# Altium PCB Misaka-v1.0.PcbDoc (part 2 of 2)
Units mm, origin at the board's own origin, x right, y up, seen from the top; angles counter-clockwise.
Board outline 100 x 100 mm, 2 copper layers (Top Layer, Bottom Layer); 149 components, 122 nets, 881 pads, 13 vias.
Unrouted connection lines stored in the file: 482.
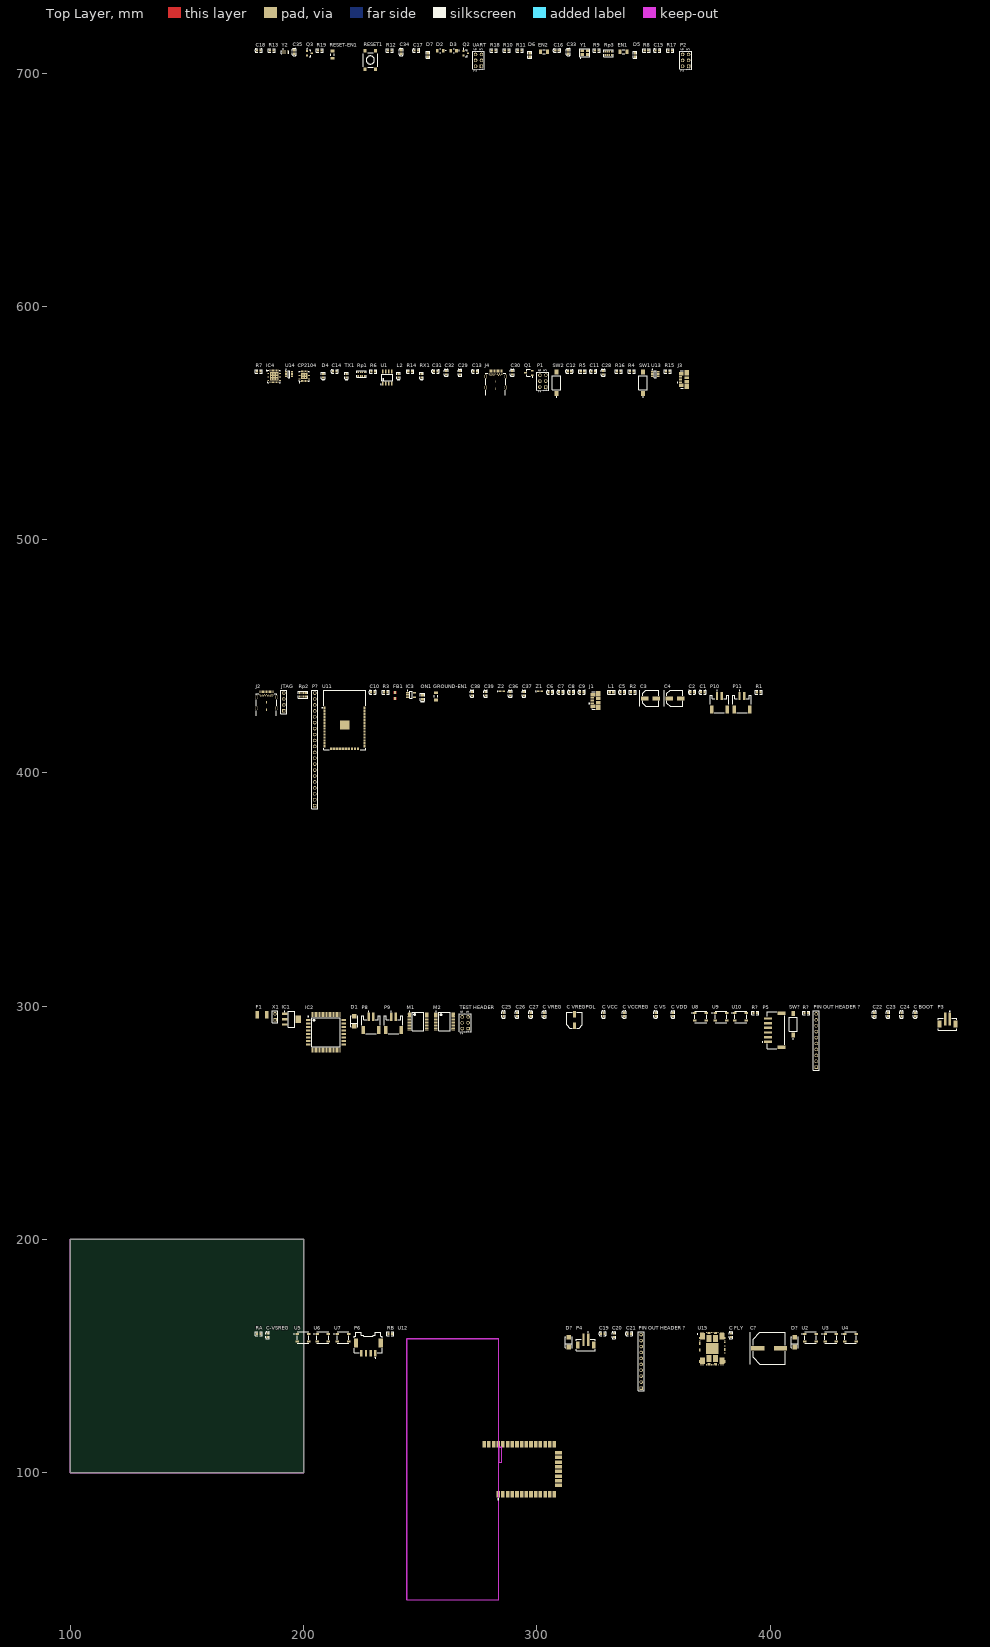
[diagram p0: Top Layer view]

## Part data (continued)
U2 U3 U4 U5 U6 U7 U8 U9 U10: library part CMP-2000-05026-1, "Intelligent Control LED Integrated Light Source, 3.5 to 5.3 V, -25 to 80 degC, 4-Pin SMD, RoHS, Tape and Reel / 1655", Color=Red,Green,Blue(RGB), Manufacturer=Adafruit-Industries-LLC, Package Description="4-Pin Surface Mount Device, Body 5 x 5 mm", Package Reference=1655, Category=Optoelectronics, Configuration=Discrete, Controller Type=-, Datasheet URL=http://datasheet.octopart.com/ADA1655-Adafruit-Industries-datasheet-32028139.pdf, Datasheet Version=May-13, Family=Addressable,Specialty, Interface=-, Manufacturer URL=https://www.adafruit.com/, Mounting Type=SurfaceMount, Number of LEDs=10, Series=Neopixel, Size / Dimension=5.00mmLx5.00mmW, Utilized LED=WS2812(5050)
U11: library part CMP-2000-07454-1, "Espressif System, 2.7 to 3.6 V, -40 to 85 degC, 38-Pin SMD", Manufacturer=Olimex, Package Description="38-Pin Surface Mount Device, Body 18 x 25.5 mm, Pitch 1.27 mm", Datasheet URL=http://www.espressif.com/sites/default/files/documentation/esp-wroom-32_datasheet_en.pdf, Datasheet Version="Rev. 2.1, 09/2017", Manufacturer URL=https://www.olimex.com, Mounting Technology=SurfaceMount, Package Reference=ESP-WROOM-32, RoHSCompliant=false
U12: library part CMP-0009-00001-1, "XBee ZB SMT RF Module, 2.4 GHz, 250 kbps, -100 dBm, 2.1 to 3.6 V, 28 mA, 3.1 mW, -40 to 85 degC, 37-Pin Module, RoHS", Manufacturer="Digi international", Operating Current (Receive)="28 mA", Operating Frequency Band="ISM 2.4 to 2.5 GHz", Operating Temperature="-40 to 85 degC", Supply Voltage="2.1 to 3.6 V", Transmit Power Output="3.1 mW", ComponentLink1Description="Manufacturer URL", ComponentLink1URL=http://www.digi.com/, ComponentLink2Description=Datasheet, ComponentLink2URL=http://ftp1.digi.com/support/documentation/90002002_K.pdf, ComponentLink3Description="Package Specification", ComponentLink3URL=http://ftp1.digi.com/support/documentation/90002002_K.pdf, DatasheetVersion=Sep-13, Indoor/Urban Range="Up to 200 ft. (60 m)", Mounting Technology="Surface Mount", Outdoor RF line-of-sight Range="Up to 4000 ft. (1200 m)", PackageDescription="37-Pin Module, Body 21.996 x 33.782 mm, Pitch 2.007 mm", PackageReference=XB24CZ7RIS-004-Module-37, PackageVersion=6/9/2013, PartNumber=XB24CZ7RIS-004, Receiver Sensitivity="-100 dBm", RF Data Rate="250000 bps", RoHS=TRUE
U13 U14: library part CMP-2000-05192-1, "Diode Array, 6 V, 10 A, -40 to 125 degC, 6-Pin SOT-23, RoHS, Tape and Reel", Clamping Voltage=15V, Manufacturer=Littelfuse, Maximum Operating Temperature=+85C, Minimum Operating Temperature=-40C, Package / Case=SOT-23-6, Package Description="6-Pin Small Outline Transistor, Body 2.9 x 1.625 mm, Pitch 0.95 mm", Package Reference=SOT23-6, Pd - Power Dissipation=150W, Peak Surge Current=10A, Working Voltage=6V, =SP3050-04HTG, Brand=Littelfuse, Datasheet URL=http://www.littelfuse.com/~/media/electronics/datasheets/tvs_diode_arrays/littelfuse_tvs_diode_array_srv05_datasheet.pdf.pdf, Datasheet Version=May-15, Height=1.45mm, Length=3mm, Manufacturer URL=http://www.littelfuse.com/, Mounting Style=SMD/SMT, Number of Channels=4Channel, Package URL=http://www.vishay.com/docs/28729/28729.pdf, Packaging=Reel, Polarity=Bidirectional, Product Category=TVSDiodeArrays, RoHS=True, Series=SRV05, Termination Style=SMD/SMT, Type=TVSDiodeArraysLowCapacitanceESDProtection, Width=3mm
U15: library part CMP-1005-00005-1, "System-In-Package Integrating Microstepping Controller and 10 A Power MOSFET, 7.5 to 85 V, -40 to 150 degC, 102-Pin QFN (VFQFN), RoHS, Tray", Manufacturer=STMicroelectronics, Operating Voltage="7.5 to 85 V", Temperature Range="-40 to 150 degC", ComponentLink1Description="Manufacturer URL", ComponentLink1URL=www.st.com, ComponentLink2Description=Datasheet, ComponentLink2URL=http://www.st.com/st-web-ui/static/active/en/resource/technical/document/datasheet/DM00090983.pdf, ComponentLink3Description="Package Specification", ComponentLink3URL=http://www.st.com/st-web-ui/static/active/en/resource/technical/document/datasheet/DM00090983.pdf, DatasheetVersion="Rev. 4", Iboot="2.6 mA Typ.", Mounting Technology="Surface Mount", PackageDescription="102-Pin Quad Flat Non-Leaded Package, Body 11 x 14 mm", Packing=Tray, PartNumber=POWERSTEP01, RDS(on)@125 degC="23 MOhm Typ.", RoHS=TRUE, RpumpHS="10 Ohm Typ."
X1: "Header, 2-Pin", LatestRevisionDate=17-Jul-2002, LatestRevisionNote="Re-released for DXP Platform.", Publisher="Altium Limited"
Y1: library part "SMD-3225_4P  16MHZ 9PF 10PPM", "贴片晶振", Package=SMD-3225_4P, SuppliersPartNumber=C13738, ComponentLink1Description=供应商链接, ComponentLink1URL=http://www.szlcsc.com/product/details_14393.html, Supplier=LC
Y2: library part CMP-0588-00001-2, "Ceramic Resonator, 16 MHz with Built-in Capacitance, Thickness Expander Mode, Initial Frequency Tolerance +/- 0.5%, Load Capacity 15 pF, -20 to 80 degC, 3.2 x 1.3 x 1 mm SMD, RoHS, Reel", Initial Frequency Tolerance="+/- 0.5%", Load Capacity="15 pF", Manufacturer=Murata, Operating Temperature Range="-20 to 80 degC", Oscillating Frequency="16 MHz", ComponentLink1Description="Manufacturer URL", ComponentLink1URL=http://www.murata.com/, ComponentLink2Description=Datasheet, ComponentLink2URL=http://www.murata.com/products/catalog/pdf/p16e.pdf, DatasheetVersion="Rev. P16E-22", Initial Tolerance="+/- 0.5%", Mounting Technology="Surface Mount", PackageDescription="3-Pin SMD, Body 3.2 x 1.3 mm, Pitch 0.95 mm", PackageReference=CSTCE_V-3, Packing=Reel, PartNumber=CSTCE16M0V53-R0, RoHS=TRUE
Z1 Z2: library part CMP-0584-00001-2, "ESD Protector, 5 V Supply, -40 to 85 degC, 1.6 x 0.8 x 0.55 mm SMD, RoHS, Tape and Reel", Manufacturer=Bourns, Operating Temperature="-40 to 85 degC", CO="0.5 pF", ComponentLink1Description="Manufacturer URL", ComponentLink1URL=http://www.bourns.com/, ComponentLink2Description=Datasheet, ComponentLink2URL=http://www.bourns.com/data/global/pdfs/MLC.pdf, DatasheetVersion="Rev. S", Mounting Technology="Surface Mount", PackageDescription="2-Pin SMD, Body 1.6 x 0.8 mm, Pitch 1.52 mm", PackageReference=CG0603-2, Packing="Tape and Reel", PartNumber=CG0603MLC-05E, RoHS=TRUE, RT="1 ns", VC="20 V", VDC="5 V", VT="150 V"

## Via types
v1: diameter 0.5, hole 0.2, Top Layer to Bottom Layer, 13 vias

## Nets (pads, with @x,y where several pads share a name; then routed paths per layer and width w, separated by ;. In a path a pad name is that pad's centre, name@x,y a point inside that pad or via, vN(x,y) a via of type N, cw(c..) or ccw(c..) an arc to the next point about the centre after c; other vN are vias at no path point)
+3.3V: "TEST HEADER.3" C10.2 C29.1 C31.1 C34.1 C35.1 CP2104.5 CP2104.6 CP2104.7 D4.A D5.A D6.A D7.A IC3.5 R14.1 R17.2 U1.6 U11.2 U12.2 U14.5 UART.1
+5: "TEST HEADER.5" C4.1 C7.1 C8.1 C9.1 C11.1 C19.1 C20.1 C21.1 C22.1 C23.1 C24.1 C25.1 C26.1 C27.1 C36.1 C37.1 C38.1 C39.1 D2.2 D3.2 IC1.2 IC1.4 IC2.10 IC2.31 IC2.61 IC2.80 IC3.1 IC3.3 L1.2 M1.13 M1.14 M1.20 M1.24 M2.13 M2.14 M2.20 M2.24 P1.2 P2.2 Q1.2 R3.1 R7.1 R8.1 R10.2 R11.2 Rp1.1 Rp1.2 U2.1 U3.1 U4.1 U5.1 U6.1 U7.1 U8.1 U9.1 U10.1 U13.5
ADCIN: RA.2 RB.1 U15.54
AIN1: IC2.78 M1.21
AIN2: IC2.77 M1.22
AREF: C13.1 IC2.98
AVCC: C6.1 IC2.100 L1.1
BIN1: IC2.76 M1.17
BIN2: IC2.75 M1.16
BUSY: R?.1@414.647,297.053 U15.15
CIN1: IC2.74 M2.21
CIN2: IC2.73 M2.22
CMP: C12.1 R4.1 R5.2 U1.5
CP: "C FLY.2" U15.57
D2+: CP2104.3 J3.3 J4.A6 J4.B6 U13.3 U13.4
D2-: CP2104.4 J3.2 J4.A7 J4.B7 U13.1 U13.6
D3: IC2.7 IC2.46 U2.4 U12.4
D6: IC2.15 M1.23
D7: IC2.16 M1.15
D8: IC2.17 M2.23
D9: IC2.18 M2.15
D28: IC2.72 M2.17
D29: IC2.71 M2.16
D39: IC2.70 M1.19 M2.19 U15.19
D+: J1.3 J2.A6 J2.B6 R2.1 Z2.2
D-: J1.2 J2.A7 J2.B7 R1.1 Z1.2
DOUT: IC2.45 U12.3
DTR: C18.1 CP2104.23 IC4.13 Q3.2 R13.2 R18.1
ESP32-EN: C28.2 C32.1 Q2.3 R14.2 Rp3.7 SW1.2 U11.3 U14.1 UART.6
FLAG: R?.1@392.803,297.053 U15.16
GATE_CMD: Q1.1 U1.7
GND: "C VCC.1" "C VCCREG.1" "C VDD.1" "C VREG.1" "C VREGPOL.2" "C VS.1" "TEST HEADER.6" C1.1 C2.2 C3.2 C4.2 C6.2 C7.2 C8.2 C9.2 C10.1 C11.2 C12.2 C13.2 C14.1 C15.1 C16.2 C17.1 C19.2 C20.2 C21.2 C22.2 C23.2 C24.2 C25.2 C26.2 C27.2 C28.1 C29.2 C30.1 C31.2 C32.2 C33.1 C34.2 C35.2 C36.2 C37.2 C38.2 C39.2 C-VSREG.2 C?.2 CP2104.2 CP2104.25 GROUND-EN1.2 IC1.1 IC2.11 IC2.32 IC2.62 IC2.81 IC2.99 IC3.2 IC4.3 IC4.33 J2.A1 J2.A12 J2.B1 J2.B12 J2.G1 J2.G2 J4.A1 J4.A12 J4.B1 J4.B12 J4.G1 J4.G2 L2.K M1.3 M1.4 M1.9 M1.10 M1.18 M2.3 M2.4 M2.9 M2.10 M2.18 ON1.K P1.6 P2.6 P3.2 P3.MP1 P3.MP2 P4.2 P4.MP1 P4.MP2 P6.MP1 P6.MP2 R5.1 R13.1 R16.1 RA.1 RESET1.1 RESET1.3 SW1.1 SW2.1 SW?.1 U2.3 U3.3 U4.3 U5.3 U6.3 U7.3 U8.3 U9.3 U10.3 U11.1 U11.15 U11.38 U12.1 U12.11 U12.13 U12.22 U12.35 U13.2 U14.2 U15.8 U15.9 U15.20 U15.21 U15.34 U15.35 U15.36 U15.39 U15.40 U15.41 U15.59 U15.77 U15.78 U15.79 U15.82 U15.83 U15.84 U15.98 U15.99 U15.100 U15.101 U15.102 UART.2 X1.1 Y2.2
  other v1: 186.225,568.876 187.325,568.876 188.425,568.876 199.729,569.553 200.829,569.553 186.225,569.976 187.325,569.976 188.425,569.976 199.729,570.653 200.829,570.653 186.225,571.076 187.325,571.076 188.425,571.076
IO0: C30.2 Q3.3 Rp3.8 SW2.2 U11.25 U14.6 UART.4
M8RXD: IC4.9 Rp1.4
M8TXD: IC4.8 Rp1.3
MISO: IC2.22 P2.1 U15.14
MISO2: IC4.17 P1.1
MOSI: IC2.21 P2.4 U15.12
MOSI2: IC4.16 P1.4
MTCK: Rp2.6 U11.16
MTDI: Rp2.7 U11.14
MTDO: Rp2.5 U11.23
MTMS: Rp2.8 U11.13
MU-XTAL1: C16.1 IC4.1 R9.2 Y1.3
MU-XTAL2: C15.2 IC4.2 R9.1 Y1.1
NetC33_2: C33.2 CP2104.16
"NetC BOOT_2": "C BOOT.2" D?.2@313.69,153.856 U15.56
"NetC FLY_1": "C FLY.1" D?.1@313.69,158.056 D?.2@410.464,153.856
"NetC VCC_2": "C VCC.2" "C VCCREG.2" U15.58 U15.60
"NetC VDD_2": "C VDD.2" "C VREG.2" "C VREGPOL.1" R?.2 U15.13 U15.62
NetCP2104_9: CP2104.9 R17.1
NetD4_K: D4.K Rp3.1
NetD5_K: D5.K Rp3.2
NetD6_K: D6.K Rp3.3
NetD7_K: D7.K Rp3.4
NetJTAG_1: JTAG.1 Rp2.1
NetJTAG_2: JTAG.2 Rp2.2
NetJTAG_3: JTAG.3 Rp2.3
NetJTAG_4: JTAG.4 Rp2.4
NetL2_A: L2.A R6.2
NetM1_1: M1.1 M1.2 P8.1
NetM1_5: M1.5 M1.6 P8.2
NetM1_7: M1.7 M1.8 P10.2
NetM1_11: M1.11 M1.12 P10.1
NetM2_1: M2.1 M2.2 P9.1
NetM2_5: M2.5 M2.6 P9.2
NetM2_7: M2.7 M2.8 P11.2
NetM2_11: M2.11 M2.12 P11.1
NetON1_A: ON1.A R3.2
NetP6_1: P6.1 U15.38 U15.42 U15.53 U15.93
NetP6_2: P6.2 U15.65 U15.76 U15.80 U15.96
NetP6_3: P6.3 U15.22 U15.33 U15.37 U15.92
NetP6_4: P6.4 U15.7 U15.81 U15.85 U15.97
NetQ2_1: Q2.1 R18.2
NetQ3_1: Q3.1 R19.2
NetR6_1: R6.1 U1.1 U1.2
NetRp1_7: Rp1.7 TX1.A
NetRp1_8: Rp1.8 RX1.A
NetSW?_2: SW?.2 U15.18
NetU2_2: U2.2 U3.4
NetU3_2: U3.2 U4.4
NetU4_2: U4.2 U5.4
NetU5_2: U5.2 U6.4
NetU6_2: U6.2 U7.4
NetU7_2: U7.2 U8.4
NetU8_2: U8.2 U9.4
NetU9_2: U9.2 U10.4
PB7: IC2.26 U1.3
PWRIN: "C BOOT.1" "C VS.2" C-VSREG.1 C?.1 D1.1 D?.1@410.464,158.056 P3.1 P4.1 RB.2 U15.1 U15.2 U15.3 U15.4 U15.5 U15.6 U15.23 U15.24 U15.25 U15.26 U15.27 U15.28 U15.29 U15.30 U15.31 U15.32 U15.43 U15.44 U15.45 U15.46 U15.47 U15.48 U15.49 U15.50 U15.51 U15.52 U15.55 U15.61 U15.66 U15.67 U15.68 U15.69 U15.70 U15.71 U15.72 U15.73 U15.74 U15.75 U15.86 U15.87 U15.88 U15.89 U15.90 U15.91 U15.94 U15.95 X1.2
RD+: IC4.30 R2.2
RD-: IC4.29 R1.2
RESET: C17.2 C18.2 D2.1 IC2.30 P2.5 R10.1 RESET1.2 RESET1.4 RESET-EN1.1 RESET-EN1.2
RESET2: D3.1 IC4.24 P1.5 R11.1
RTS: CP2104.19 Q2.2 R19.1
RX0: IC2.2 Rp1.5
RX2: IC2.12 U11.18
RX3: "TEST HEADER.4" IC2.63
RXD: CP2104.20 EN2.1 Rp3.6 U14.3 UART.3
RXD0: EN1.2 U11.34
RXL: IC4.10 RX1.K
SCK: IC2.20 P2.3 U15.11
SCK2: IC4.15 P1.3
SCL: IC2.43 R7.2
SDA: IC2.44 R8.2
SS: "TEST HEADER.1" IC2.19 U15.10
STCK: U15.17
TX0: IC2.3 Rp1.6
TX2: IC2.13 U11.17
TX3: "TEST HEADER.2" IC2.64
TXD: CP2104.21 EN1.1 Rp3.5 U14.4 UART.5
TXD0: EN2.2 U11.35
TXL: IC4.11 TX1.K
UGND: C5.2 FB1.2 IC4.28 J1.5 J3.5
USBVCC: C1.2 F1.2 IC4.31 Q1.3
USHIELD: FB1.1 J1.6 J1.7 J1.8 J1.9 J1.10 J1.11 J2.Shell J3.6 J3.7 J3.8 J3.9 J3.10 J3.11 J4.Shell Z1.1 Z2.1
VBUS: F1.1 J1.1 J2.A4 J2.A9 J2.B4 J2.B9 J3.1 J4.A4 J4.A9 J4.B4 J4.B9 R15.2
VBUS3.3: CP2104.8 R15.1 R16.2
VCC: C14.2 IC4.4 IC4.32
VIN: C2.1 C3.1 D1.2 IC1.3 R4.2
VUCAP: C5.1 IC4.27
XTAL1: IC2.34 R12.2 Y2.3
XTAL2: IC2.33 R12.1 Y2.1
pads on no net: "PIN OUT HEADER ?.1" "PIN OUT HEADER ?.2" "PIN OUT HEADER ?.3" "PIN OUT HEADER ?.4" "PIN OUT HEADER ?.5" "PIN OUT HEADER ?.6" "PIN OUT HEADER ?.7" "PIN OUT HEADER ?.8" "PIN OUT HEADER ?.9" "PIN OUT HEADER ?.10" CP2104.1 CP2104.10 CP2104.11 CP2104.12 CP2104.13 CP2104.14 CP2104.15 CP2104.17 CP2104.18 CP2104.22 CP2104.24 GROUND-EN1.1 IC2.1 IC2.4 IC2.5 IC2.6 IC2.8 IC2.9 IC2.14 IC2.23 IC2.24 IC2.25 IC2.27 IC2.28 IC2.29 IC2.35 IC2.36 IC2.37 IC2.38 IC2.39 IC2.40 IC2.41 IC2.42 IC2.47 IC2.48 IC2.49 IC2.50 IC2.51 IC2.52 IC2.53 IC2.54 IC2.55 IC2.56 IC2.57 IC2.58 IC2.59 IC2.60 IC2.65 IC2.66 IC2.67 IC2.68 IC2.69 IC2.79 IC2.82 IC2.83 IC2.84 IC2.85 IC2.86 IC2.87 IC2.88 IC2.89 IC2.90 IC2.91 IC2.92 IC2.93 IC2.94 IC2.95 IC2.96 IC2.97 IC3.4 IC4.5 IC4.6 IC4.7 IC4.12 IC4.14 IC4.18 IC4.19 IC4.20 IC4.21 IC4.22 IC4.23 IC4.25 IC4.26 J1.4 J2.A2 J2.A3 J2.A5 J2.A8 J2.A10 J2.A11 J2.B2 J2.B3 J2.B5 J2.B8 J2.B10 J2.B11 J3.4 J4.A2 J4.A3 J4.A5 J4.A8 J4.A10 J4.A11 J4.B2 J4.B3 J4.B5 J4.B8 J4.B10 J4.B11 P5.1 P5.2 P5.3 P5.4 P5.5 P5.6 P5.MP1 P5.MP2 P8.MP1 P8.MP2 P9.MP1 P9.MP2 P10.MP1 P10.MP2 P11.MP1 P11.MP2 P?.1 P?.2 P?.3 P?.4 P?.5 P?.6 P?.7 P?.8 P?.9 P?.10 P?.11 P?.12 P?.13 P?.14 P?.15 P?.16 P?.17 P?.18 P?.19 P?.20 U1.4 U1.8 U10.2 U11.4 U11.5 U11.6 U11.7 U11.8 U11.9 U11.10 U11.11 U11.12 U11.19 U11.20 U11.21 U11.22 U11.24 U11.26 U11.27 U11.28 U11.29 U11.30 U11.31 U11.32 U11.33 U11.36 U11.37 U12.5 U12.6 U12.7 U12.8 U12.9 U12.10 U12.12 U12.14 U12.15 U12.16 U12.17 U12.18 U12.19 U12.20 U12.21 U12.23 U12.24 U12.25 U12.26 U12.27 U12.28 U12.29 U12.30 U12.31 U12.32 U12.33 U12.34 U12.36 U12.37 U15.63 U15.64 Y1.2 Y1.4

## Keep-outs
Keep-Out Layer:
  the board outline again, w0.254

## Text inside footprints (layer, text, board x,y; h text height)
FB1: Mechanical 6 "Land Pattern Adapted for 35um Land Pad Thickness" at 238.216,430.847 h0.1 r90
J1: Mechanical 6 "PCB EDGE" at 327.893,423.838 h0.3 r90
J2: Mechanical 2 "PCB Edge" at 182.323,423.279 h0.61
J3: Mechanical 6 "PCB EDGE" at 365.739,561.379 h0.3 r90
J4: Mechanical 2 "PCB Edge" at 280.621,560.82 h0.61
P1: Top Overlay "6" at 301.752,572.008 h1.27 r90; Top Overlay "5" at 304.292,572.008 h1.27 r90; Top Overlay "2" at 301.752,562.864 h1.27 r90; Top Overlay "1" at 304.292,563.372 h1.27 r90
P2: Top Overlay "6" at 362.966,709.549 h1.27 r90; Top Overlay "5" at 365.506,709.549 h1.27 r90; Top Overlay "2" at 362.966,700.405 h1.27 r90; Top Overlay "1" at 365.506,700.913 h1.27 r90
"TEST HEADER": Top Overlay "6" at 268.478,296.926 h1.27 r90; Top Overlay "5" at 271.018,296.926 h1.27 r90; Top Overlay "2" at 268.478,287.782 h1.27 r90; Top Overlay "1" at 271.018,288.29 h1.27 r90
U12: Mechanical 6 "Board Edge" at 272.415,27.254 h1.5 r90; Mechanical 6 "Recommended Keepout Area for PCB Antenna (All Layers)" at 242.108,50.473 h2 r90; Mechanical 6 "COPPER" at 291.358,98.973 h1 r90; Mechanical 6 "KEEP-OUT" at 292.608,98.973 h1 r90
UART: Top Overlay "6" at 274.193,709.549 h1.27 r90; Top Overlay "5" at 276.733,709.549 h1.27 r90; Top Overlay "2" at 274.193,700.405 h1.27 r90; Top Overlay "1" at 276.733,700.913 h1.27 r90